# Allegro board arduino_r3_1.brd
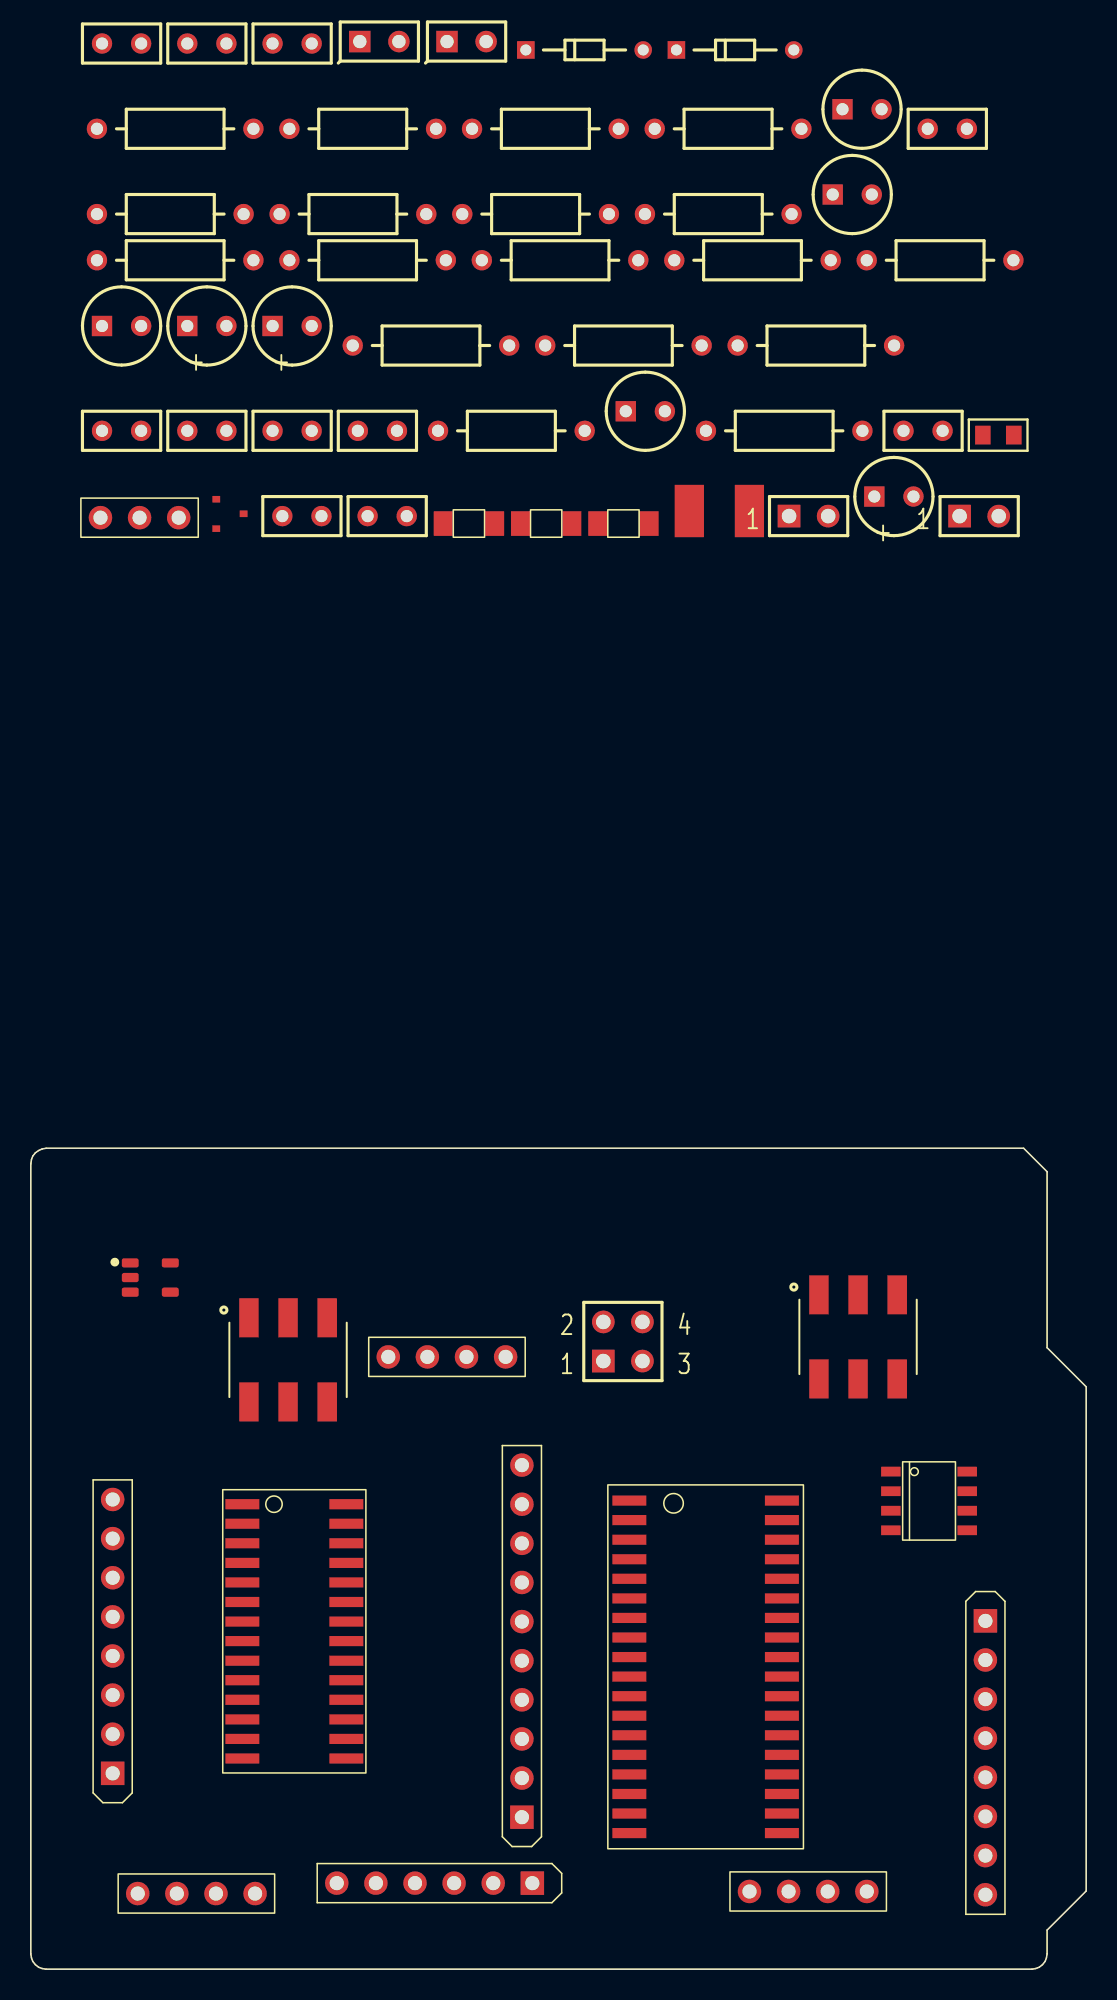
[diagram p0: board, top side]
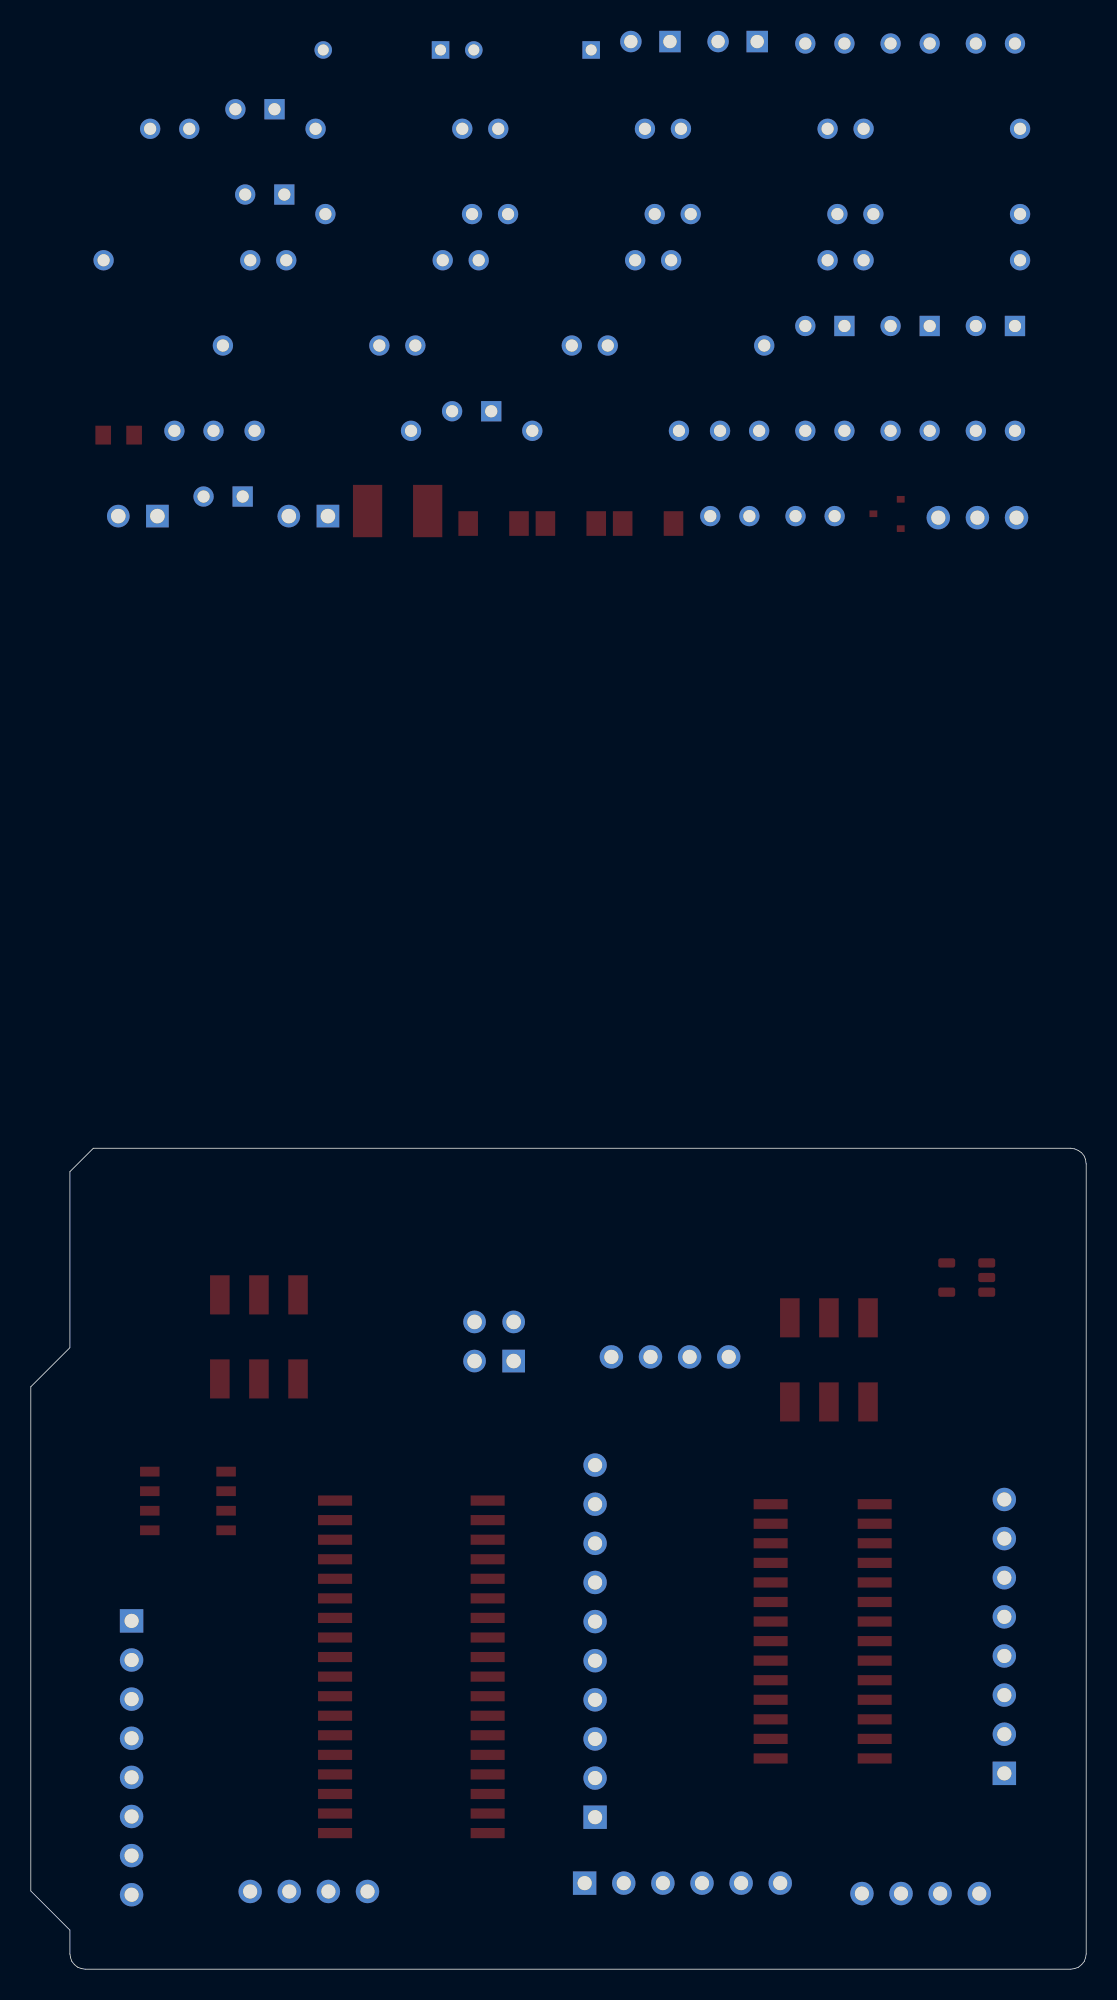
[diagram p1: board, bottom side, seen from below]

Outline 68.53 x 53.3 mm; copper layers: TOP, BOTTOM. Coordinates in mm from the lower left corner of the outline.
Outline path: 0,52.28 0,0.99 0.04,0.74 0.13,0.51 0.3,0.3 0.51,0.13 0.74,0.04 0.99,0 65,0 65.25,0.04 65.49,0.13 65.7,0.3 65.87,0.51 65.95,0.74 66,0.99 66,2.54 68.53,5.08 68.53,37.81 66,40.35 66,51.78 64.47,53.3 0.99,53.3 0.74,53.26 0.51,53.15 0.3,53 0.13,52.79 0.04,52.56 0,52.28

## Design rules (mm)
constraint set DEFAULT: min track width 0.254, pair gap 0.254

## Placement (name value [footprint] x y rotation side)
AD1  IOL  [SIP8]  5.32 12.72 180 top
C1  100n  [RAD200X100LS100031]  21.24 99.88 0 top
C2  100n  [CPCYL1D200LS100031]  54.78 95.61 0 top
C3  1u  [RAD200X100LS100031]  16.34 94.34 0 top
C4  100n  [RAD200X100LS100031]  15.7 99.88 0 top
C5  100n  [RAD200X100LS100031]  10.16 99.88 0 top
C6  100n  [RAD200X100LS100031]  4.63 99.88 0 top
C7  100n  [RAD200X100LS100031]  56.67 99.88 0 top
C8  1u  [RAD200X100LS100031]  21.87 94.34 0 top
D1  M7  [SMDRES]  28.45 93.86 0 top
D2  DIODE  [SMDRES]  33.47 93.86 0 top
D3  DIODE  [SMDRES]  38.48 93.86 0 top
F1  MF-MSMF010-2 500mA  [FUSM1812X02]  44.71 94.67 0 top
GROUND1  SW SPST  [BLKCON100VHTM1SQW1002]  49.24 94.34 0 top
IC1  ATMEGA328P-PU  [SOJ28]  17.11 21.94 0 top
IC2  ATMEGA8U2-MU  [SOJ36]  43.82 19.63 0 top
ICSP1  3x2 M  [AMPHENOL_95278-101A06LF]  16.71 39.56 0 top
ICSP2  CON6AP  [AMPHENOL_95278-101A06LF]  53.72 41.05 0 top
IOH1  10x1F-H8.5  [SIP10]  31.89 9.87 180 top
JP1  2x2 M - NM  [JUMPER4]  46.67 5.05 0 top
L1  YELLOW  [CYLD200LS100031]  38.64 101.15 0 top
L2  BLM21  [SML0805]  61.83 99.6 0 top
ON1  GREEN  [CYLD200LS100031]  52.07 115.22 0 top
PC1  47u  [CPCYL1D200LS100031]  10.16 106.69 0 top
PC2  47u  [CPCYL1D200LS100031]  15.7 106.69 0 top
POWER1  8x1F-H8.5  [SIP8]  61.99 22.61 0 top
R1  1M  [AX400X100031]  33.4 105.42 0 top
RESET1  SW PUSHBUTTON-SPST-2  [BLKCON100VHTM2OEW2004]  37.18 39.48 0 top
RESET-EN1  SW SPST  [BLKCON100VHTM1SQW1002]  60.31 94.34 0 top
RN1B1  10K  [AX400X100031]  4.3 110.96 0 top
RN1D1  10K  [AX400X100031]  16.79 110.96 0 top
RN2A1  1K  [AX400X100031]  45.9 105.42 0 top
RN2B1  10K  [AX400X100031]  29.29 110.96 0 top
RN2C1  10K  [AX400X100031]  41.79 110.96 0 top
RN2D1  1K  [AX400X100031]  20.91 105.42 0 top
RN3A1  22R  [AX375X100031]  54.28 110.96 0 top
RN3B1  22R  [AX375X100031]  4.3 113.95 0 top
RN3C1  22R  [AX375X100031]  16.16 113.95 0 top
RN3D1  22R  [AX375X100031]  28.02 113.95 0 top
RN4B1  RN4A  [AX375X100031]  39.88 113.95 0 top
RN4D1  1K  [AX400X100031]  43.84 99.88 0 top
RX1  YELLOW  [CYLD200LS100031]  52.71 120.76 0 top
T1  FDN340P  [SOT23]  12.93 94.5 0 top
TX1  YELLOW  [CYLD200LS100031]  4.63 106.69 0 top
U1  LM358IDGKR  [SOIC8]  58.33 30.4 0 top
U2  NCP117ST50T3G  [JUMPER4]  6.94 4.91 0 top
U3  LP2985-33DBVR  [SOT95P280X145-5N]  7.76 44.91 0 top
UNK1K1  RN4C  [AX375X100031]  16.79 119.49 0 top
UNK1K2  1K  [AX400X100031]  4.3 119.49 0 top
UNK1M1  R2  [AX375X100031]  26.44 99.88 0 top
UNK6X1F-H8.1  8x1F-H8.5  [SIP6]  32.57 5.59 270 top
UNK10K1  RN1A  [AX375X100031]  40.52 119.49 0 top
UNK10K2  RN1C  [AX375X100031]  28.65 119.49 0 top
X1  POWERSUPPLY_DC21MMX  [JUMPER3]  4.52 94.24 0 top
X2  CON4  [JUMPER4]  23.21 39.76 0 top
XT1  22P  [RAD200X100LS100031]  58.24 119.49 0 top
XT2  22P  [RAD200X100LS100031]  4.63 125.03 0 top
XTAL1  22P  [RAD200X100LS100031]  10.16 125.03 0 top
XTAL2  22P  [RAD200X100LS100031]  15.7 125.03 0 top
Y1  16MHz  [SIPTML2002]  21.36 125.15 0 top
Y2  16MHz  [SIPTML2002]  27.03 125.15 0 top
Z1  CGO603MLC-05E  [DAX2300X050028]  39.77 124.61 0 top
Z2  CG603MLC-05E  [DAX2300X050028]  49.55 124.61 0 top

## Library data of the parts
AD1 POWER1 = CON8_0: User Part Number: ***
C1 C3-C8 XT1 XT2 XTAL1 XTAL2 = CAP NP
C2 PC1 PC2 = CAP POL
D1-D3 = DIODE_0: Tolerance: ***; User Part Number: ***
F1 = FUSEHOLDER
GROUND1 RESET-EN1 = SW SPST
IC1 = ATMega8-TQFP32_1: Tolerance: ***; User Part Number: ***
IC2 = ATMega8-TQFP32_0: Tolerance: ***; User Part Number: ***
ICSP1 = CON6A
ICSP2 = CON6AP_3
IOH1 = CON10: User Part Number: ***
JP1 = CON4A: User Part Number: ***
L1 ON1 RX1 TX1 = LED
L2 = BEAD
R1 RN1B1 RN1D1 RN2A1 RN2B1 RN2C1 RN2D1 RN3A1 RN3B1 RN3C1 RN3D1 RN4B1 RN4D1 UNK1K1 UNK1K2 UNK1M1 UNK10K1 UNK10K2 = R2_0
RESET1 = SW PUSHBUTTON-SPST-2
T1 = MOSFET P
U1 = LM358_2: Tolerance: ***; User Part Number: ***
U2 X2 = CON4: User Part Number: ***
U3 = LP2985-33DBVR
UNK6X1F-H8.1 = CON6: User Part Number: ***
X1 = CON3: User Part Number: ***
Y1 Y2 = ZTA
Z1 Z2 = VARISTOR

## Footprints (pads in the part's own frame, mm; a bottom-side part is the same pattern mirrored in y, then rotated)
AMPHENOL_95278-101A06LF
  rect 1.27x2.54 smd: 1(-2.54,2.73) 2(-2.54,-2.73) 3(0,2.73) 4(0,-2.73) 5(2.54,2.73) 6(2.54,-2.73)
AX375X100031
  round 1.321 hole 0.787: 1(0,0) 2(9.525,0)
AX400X100031
  round 1.321 hole 0.787: 1(0,0) 2(10.16,0)
BLKCON100VHTM1SQW1002
  rect 1.473x1.473 hole 0.94: 1(0,0)
  round 1.473 hole 0.94: 2(2.54,0)
BLKCON100VHTM2OEW2004
  rect 1.473x1.473 hole 0.94: 1(0,0)
  round 1.473 hole 0.94: 2(0,2.54) 3(2.54,0) 4(2.54,2.54)
CPCYL1D200LS100031
  rect 1.321x1.321 hole 0.787: 1(0,0)
  round 1.321 hole 0.787: 2(2.54,0)
CYLD200LS100031
  rect 1.321x1.321 hole 0.787: 1(0,0)
  round 1.321 hole 0.787: 2(2.54,0)
DAX2300X050028
  round 1.143 hole 0.711: 1(0,0)
  rect 1.143x1.143 hole 0.711: 2(-7.62,0)
FUSM1812X02
  rect 1.9x3.4 smd: 1(-1.95,0) 2(1.95,0)
JUMPER3
  round 1.524 hole 0.914: 1(0,0) 2(2.54,0) 3(5.08,0)
JUMPER4
  round 1.524 hole 0.914: 1(0,0) 2(2.54,0) 3(5.08,0) 4(7.62,0)
RAD200X100LS100031
  round 1.321 hole 0.787: 1(0,0) 2(2.54,0)
SIP6
  rect 1.524x1.524 hole 0.914: 1(0,0)
  round 1.524 hole 0.914: 2(0,-2.54) 3(0,-5.08) 4(0,-7.62) 5(0,-10.16) 6(0,-12.7)
SIP8
  rect 1.524x1.524 hole 0.914: 1(0,0)
  round 1.524 hole 0.914: 2(0,-2.54) 3(0,-5.08) 4(0,-7.62) 5(0,-10.16) 6(0,-12.7) 7(0,-15.24) 8(0,-17.78)
SIP10
  rect 1.524x1.524 hole 0.914: 1(0,0)
  round 1.524 hole 0.914: 2(0,-2.54) 3(0,-5.08) 4(0,-7.62) 5(0,-10.16) 6(0,-12.7) 7(0,-15.24) 8(0,-17.78) 9(0,-20.32) 10(0,-22.86)
SIPTML2002
  rect 1.397x1.397 hole 0.864: 1(0,0)
  round 1.397 hole 0.864: 2(2.54,0)
SMDRES
  rect 1.27x1.6 smd: 1(-1.651,0) 2(1.651,0)
SML0805
  rect 1.016x1.219 smd: 1(0,0) 2(2.007,0)
SOIC8
  rect 1.27x0.635 smd: 1(-2.477,1.905) 2(-2.477,0.635) 3(-2.477,-0.635) 4(-2.477,-1.905) 5(2.477,-1.905) 6(2.477,-0.635) 7(2.477,0.635) 8(2.477,1.905)
SOJ28
  rect 2.21x0.66 smd: 1(-3.378,8.255) 2(-3.378,6.985) 3(-3.378,5.715) 4(-3.378,4.445) 5(-3.378,3.175) 6(-3.378,1.905) 7(-3.378,0.635) 8(-3.378,-0.635) 9(-3.378,-1.905) 10(-3.378,-3.175) 11(-3.378,-4.445) 12(-3.378,-5.715) 13(-3.378,-6.985) 14(-3.378,-8.255) 15(3.378,-8.255) 16(3.378,-6.985) 17(3.378,-5.715) 18(3.378,-4.445) 19(3.378,-3.175) 20(3.378,-1.905) 21(3.378,-0.635) 22(3.378,0.635) 23(3.378,1.905) 24(3.378,3.175) 25(3.378,4.445) 26(3.378,5.715) 27(3.378,6.985) 28(3.378,8.255)
SOJ36
  rect 2.21x0.66 smd: 1(-4.953,10.795) 2(-4.953,9.525) 3(-4.953,8.255) 4(-4.953,6.985) 5(-4.953,5.715) 6(-4.953,4.445) 7(-4.953,3.175) 8(-4.953,1.905) 9(-4.953,0.635) 10(-4.953,-0.635) 11(-4.953,-1.905) 12(-4.953,-3.175) 13(-4.953,-4.445) 14(-4.953,-5.715) 15(-4.953,-6.985) 16(-4.953,-8.255) 17(-4.953,-9.525) 18(-4.953,-10.795) 19(4.953,-10.795) 20(4.953,-9.525) 21(4.953,-8.255) 22(4.953,-6.985) 23(4.953,-5.715) 24(4.953,-4.445) 25(4.953,-3.175) 26(4.953,-1.905) 27(4.953,-0.635) 28(4.953,0.635) 29(4.953,1.905) 30(4.953,3.175) 31(4.953,4.445) 32(4.953,5.715) 33(4.953,6.985) 34(4.953,8.255) 35(4.953,9.525) 36(4.953,10.795)
SOT23
  rect 0.508x0.432 smd: 1(-0.889,0.94) 2(-0.889,-0.965) 3(0.889,0)
SOT95P280X145-5N
  custom 1.1x0.6 smd: 1(-1.3,0.95) 2(-1.3,0) 3(-1.3,-0.95) 4(1.3,-0.95) 5(1.3,0.95)

## Nets
+3V3: C3.1 POWER1.4 U1.6 U3.5
+5V: C1.1 C1.2 C2.1 C2.2 C3.2 C4.1 C6.1 C6.2 C7.1 C7.2 C8.1 D2.1(K) D3.1(K) GROUND1.1 GROUND1.2 IC1.7 IC1.8 IC1.20 IC1.22 IC2.3 IC2.4 IC2.28 IC2.32 IC2.33 ICSP1.2 ICSP1.6 ICSP2.2 ICSP2.6 IOH1.7 L1.1(CATHODE) L1.2 L2.1 ON1.1(CATHODE) PC1.1 PC1.2 PC2.2 POWER1.2 POWER1.5 POWER1.6 POWER1.7 POWER1.8 RESET1.3 RESET1.4 RN1B1.1 RN1B1.2 RN1D1.1 RN2A1.1 RN2A1.2 RN2B1.1 RN2B1.2 RN2C1.2 RN2D1.1 RN4D1.1 RX1.2 T1.3(SOURCE) U1.1 U1.2 U1.5 U2.1 U2.2 U2.4 U3.1 U3.2 U3.3(\\E\N) UNK1K1.1 UNK10K1.1 UNK10K1.2 UNK10K2.2 X1.1 X1.3 X2.4 XT1.1 XT2.1 XTAL1.1 XTAL2.1
6: RN2C1.1 TX1.2
AD0: IC1.23 UNK6X1F-H8.1.6
AD1: IC1.24 UNK6X1F-H8.1.5
AD2: IC1.25 UNK6X1F-H8.1.4
AD3: IC1.26 UNK6X1F-H8.1.3
AD4/SDA: IC1.27 IOH1.9 UNK6X1F-H8.1.2
AD5/SCL: IC1.28 IOH1.10 UNK6X1F-H8.1.1
AREF: C4.2 IC1.21 IOH1.8
CD1206-S01575: IC2.15 ICSP2.3
D+: RN3D1.2 X2.3 Z1.1
D-: RN3A1.2 X2.2 Z2.1
DTR: IC2.16 ICSP2.4
GATE_CMD: T1.1 U1.7(OUT)
I08: IC1.14 IOH1.1
I09: IC1.15 IOH1.2
IO0: AD1.8 IC1.2 UNK1K2.2
IO1: AD1.7 IC1.3 RN4B1.2
IO2: AD1.5 IC1.5
IO3: AD1.6 IC1.4
IO4: AD1.4 IC1.6
IO5: AD1.3 IC1.11
IO6: AD1.2 IC1.12
IO7: AD1.1 IC1.13
M8RTD: IC2.8 RN4B1.1
M8RXD: IC2.9 UNK1K2.1
MIS02: IC2.17 ICSP2.1
MISO: IC1.18 ICSP1.1 IOH1.5
MOSI: IC1.17 ICSP1.4 IOH1.4
PB4: IC2.18 JP1.1
PB5: IC2.19 JP1.3
PB6: IC2.20 JP1.2
PB7: IC2.21 JP1.4
PWRIN: D1.2 X1.2
RD+: IC2.29 RN3D1.1
RD-: IC2.30 RN3A1.1
RESET: C5.2 D3.2 IC1.1 ICSP1.5 POWER1.3 RESET1.1 RESET1.2 RESET-EN1.1 RESET-EN1.2 RN1D1.2
RESET2: IC2.24 ICSP2.5 UNK10K2.1
RXLED: IC2.10 RX1.1(CATHODE)
SCK: IC1.19 ICSP1.3 IOH1.6 U1.3
SS: IC1.16 IOH1.3
TP_VUCAP: C8.2 IC2.27
TXLED: IC2.11 TX1.1(CATHODE)
USBVCC: F1.2 IC2.31 T1.2
XUSB: F1.1 X2.1
N01646: IC2.2(XTAL2(PC0)) R1.2 XT1.2 Y2.2
N01697: IC2.1 R1.1 XT2.2 Y2.1
N02789: L2.2 Z1.2 Z2.2
N06996: IC1.10(XTAL2) UNK1M1.1 XTAL1.2 Y1.2
N07029: IC1.9 UNK1M1.2 XTAL2.2 Y1.1
N07932: C5.1 IC2.13 RN2D1.2
N15746: ON1.2 RN4D1.2 UNK1K1.2
N17167: D1.1(K) PC2.1 U2.3
N29551: D2.2

Pads without a net: IC2 5 6 7 12 14 22 23 25 26 34 35 36; POWER1 1; RN3B1 1 2; RN3C1 1 2; U1 4 8; U3 4
